# Altium PCB IMX6WBED.PcbDoc (part 2 of 10)
Units mil, origin at the board's own origin, x right, y up, seen from the top; angles counter-clockwise.
Board outline 3318.23 x 4815.16 mil, 6 copper layers (Top Layer, L2_GND_1, L3_INT_1, L6_INT_2, L7_PWR_2, Bottom Layer), stack 27.7 mil thick; 504 components, 400 nets, 2357 pads, 1199 vias.
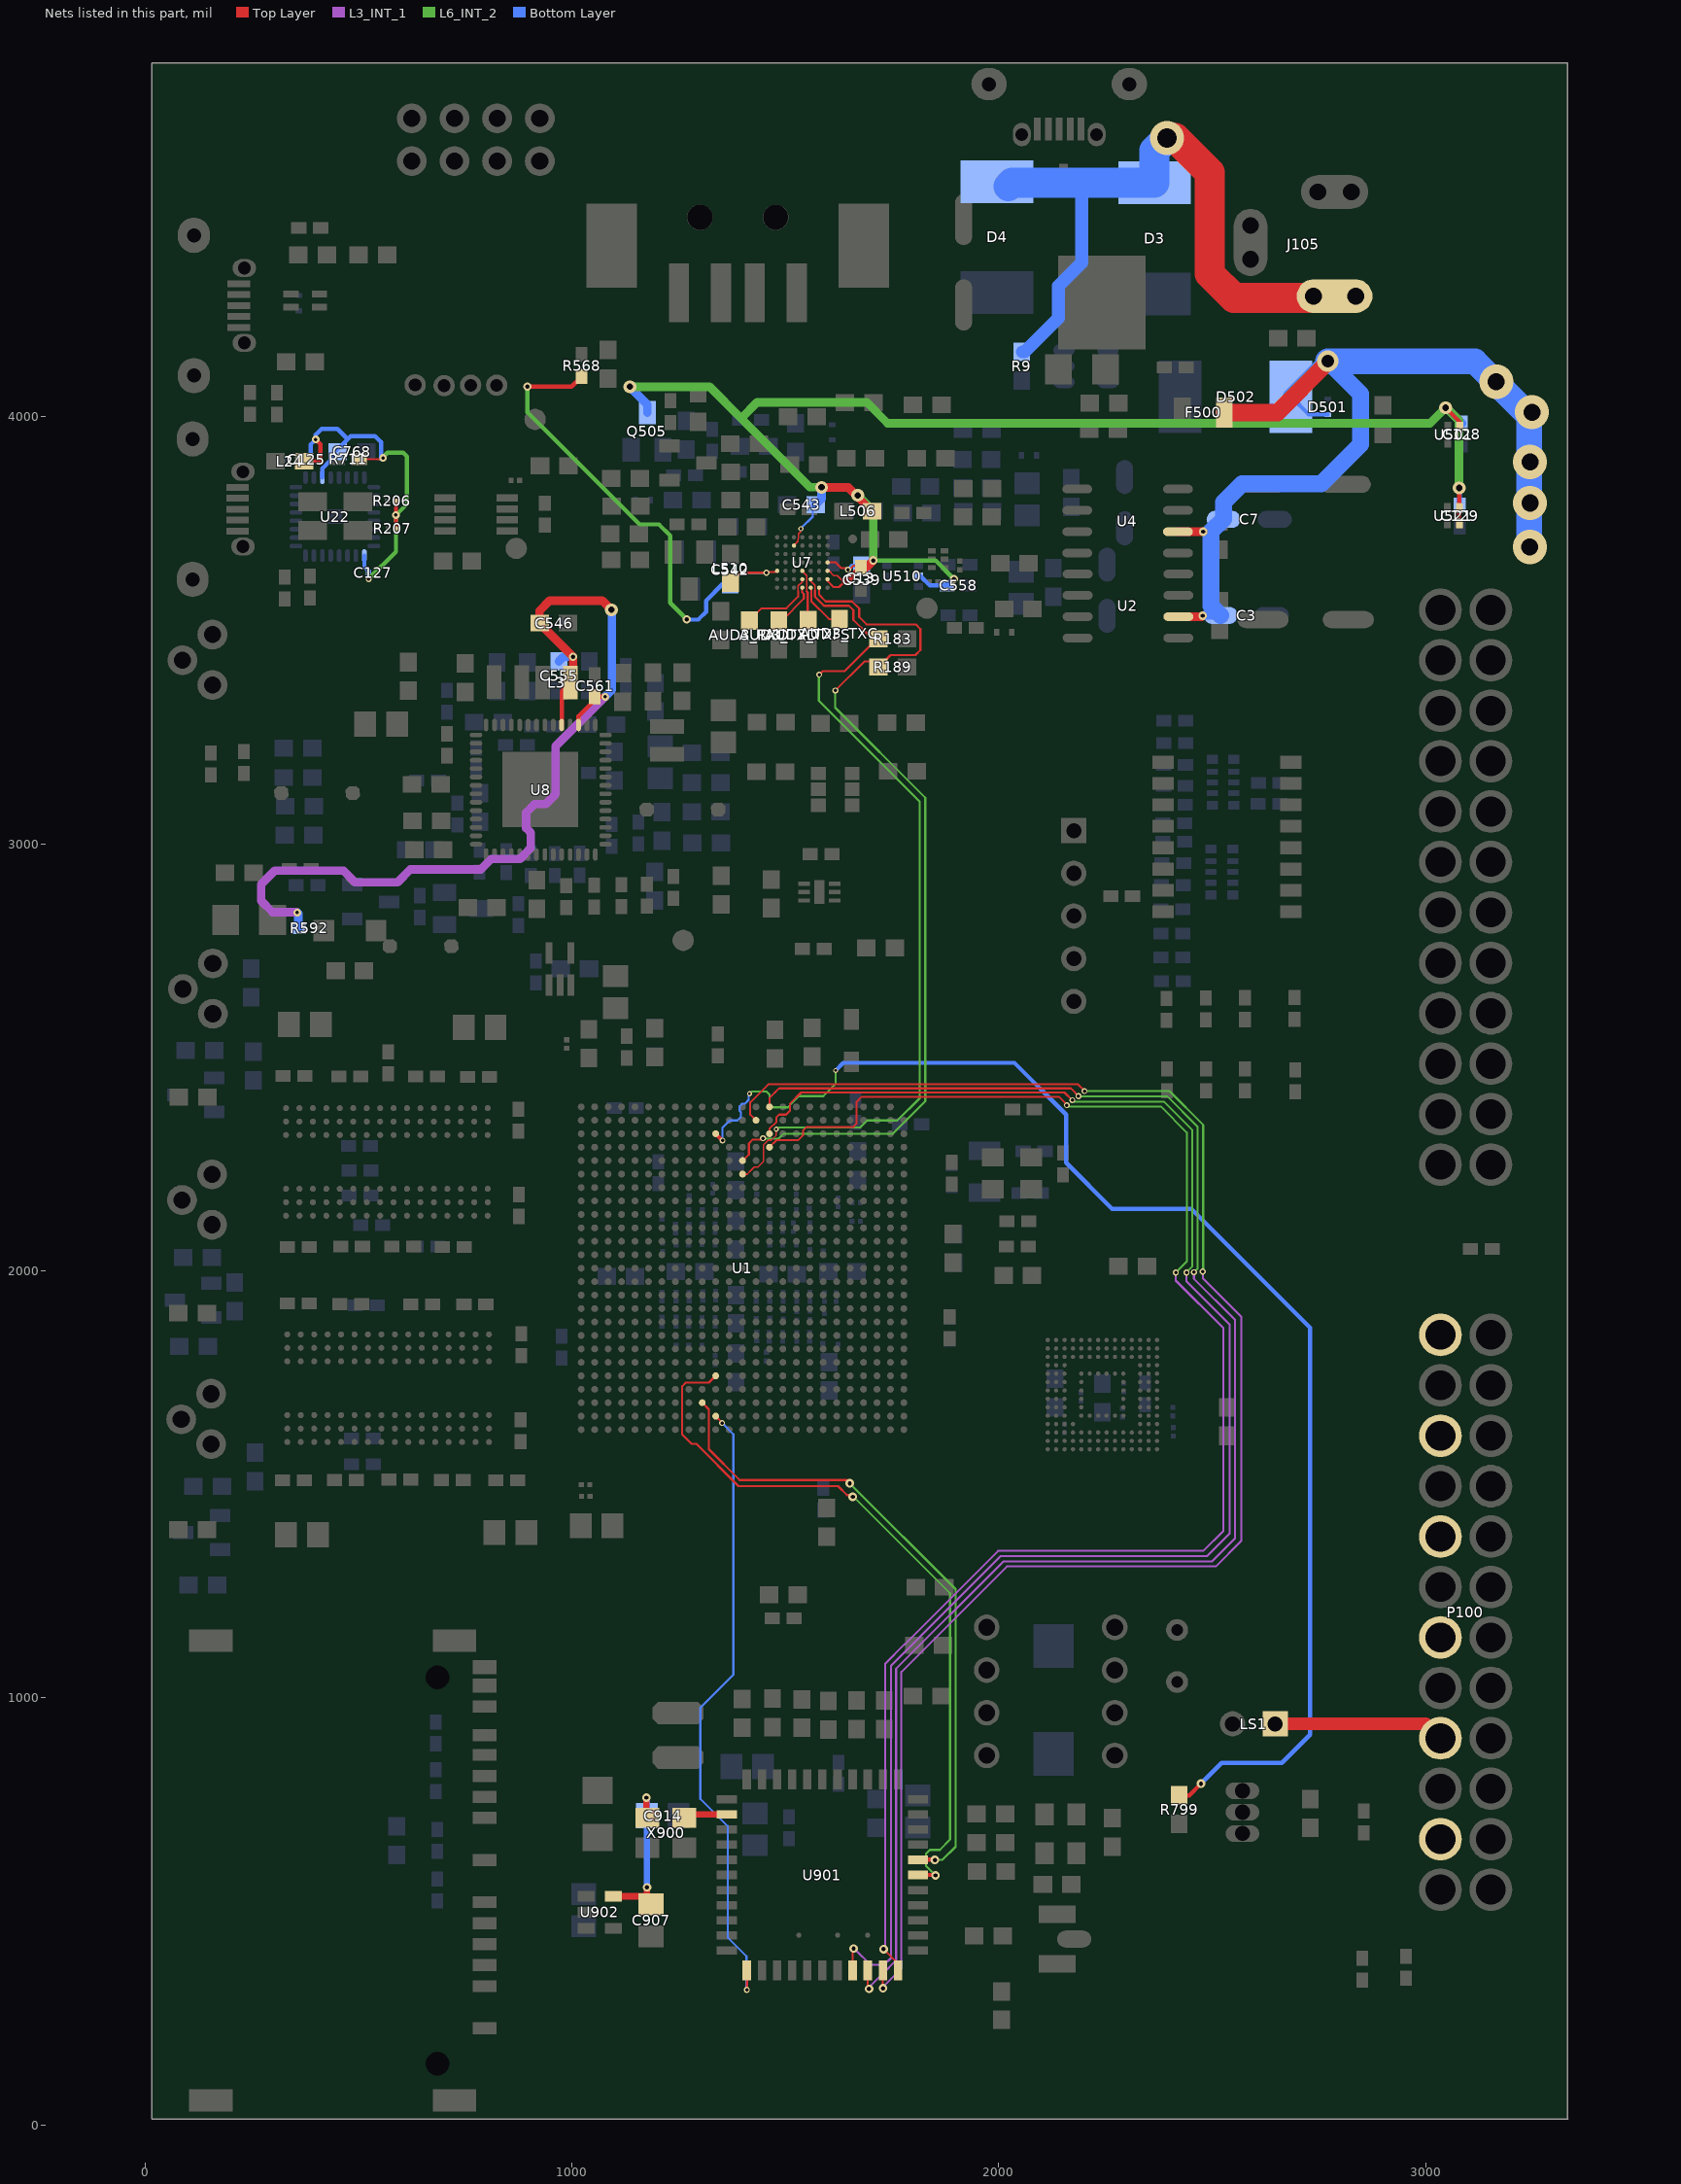
[diagram p6: the nets of this part, all layers, seen from the top]

## Footprints (in the part's own frame and the unit in brackets; to place one, negate y for a bottom-side part, rotate by r counter-clockwise, add the part's x,y. Pads: shape width x height; smd on the part's side, far side on the other; paste and mask are expansions set on the pad) (continued)
IMX6DL-BGA624X25 [mil] "IMX6DL"
  round 16 smd: A2(31.5,0) A3(62.99,0) A4(94.49,0) A5(125.98,0) A6(157.48,0) A7(188.98,0) A8(220.47,0) A9(251.97,0) A10(283.46,0) A11(314.96,0) A12(346.46,0) A13(377.95,0) A14(409.45,0) A15(440.94,0) A16(472.44,0) A17(503.94,0) A18(535.43,0) A19(566.93,0) A20(598.42,0) A21(629.92,0) A22(661.42,0) A23(692.91,0) A24(724.41,0) A25(755.9,0) AA1(0,-629.92) AA2(31.5,-629.92) AA3(62.99,-629.92) AA4(94.49,-629.92) AA5(125.98,-629.92) AA6(157.48,-629.92) AA7(188.98,-629.92) AA8(220.47,-629.92) AA9(251.97,-629.92) AA10(283.46,-629.92) AA11(314.96,-629.92) AA12(346.46,-629.92) AA13(377.95,-629.92) AA14(409.45,-629.92) AA15(440.94,-629.92) AA16(472.44,-629.92) AA17(503.94,-629.92) AA18(535.43,-629.92) AA19(566.93,-629.92) AA20(598.42,-629.92) AA21(629.92,-629.92) AA22(661.42,-629.92) AA23(692.91,-629.92) AA24(724.41,-629.92) AA25(755.9,-629.92) AB1(0,-661.42) AB2(31.5,-661.42) AB3(62.99,-661.42) AB4(94.49,-661.42) AB5(125.98,-661.42) AB6(157.48,-661.42) AB7(188.98,-661.42) AB8(220.47,-661.42) AB9(251.97,-661.42) AB10(283.46,-661.42) AB11(314.96,-661.42) AB12(346.46,-661.42) AB13(377.95,-661.42) AB14(409.45,-661.42) AB15(440.94,-661.42) AB16(472.44,-661.42) AB17(503.94,-661.42) AB18(535.43,-661.42) AB19(566.93,-661.42) AB20(598.42,-661.42) AB21(629.92,-661.42) AB22(661.42,-661.42) AB23(692.91,-661.42) AB24(724.41,-661.42) AB25(755.9,-661.42) AC1(0,-692.91) AC2(31.5,-692.91) AC3(62.99,-692.91) AC4(94.49,-692.91) AC5(125.98,-692.91) AC6(157.48,-692.91) AC7(188.98,-692.91) AC8(220.47,-692.91) AC9(251.97,-692.91) AC10(283.46,-692.91) AC11(314.96,-692.91) AC12(346.46,-692.91) AC13(377.95,-692.91) AC14(409.45,-692.91) AC15(440.94,-692.91) AC16(472.44,-692.91) AC17(503.94,-692.91) AC18(535.43,-692.91) AC19(566.93,-692.91) AC20(598.42,-692.91) AC21(629.92,-692.91) AC22(661.42,-692.91) AC23(692.91,-692.91) AC24(724.41,-692.91) AC25(755.9,-692.91) AD1(0,-724.41) AD2(31.5,-724.41) AD3(62.99,-724.41) AD4(94.49,-724.41) AD5(125.98,-724.41) AD6(157.48,-724.41) AD7(188.98,-724.41) AD8(220.47,-724.41) AD9(251.97,-724.41) AD10(283.46,-724.41) AD11(314.96,-724.41) AD12(346.46,-724.41) AD13(377.95,-724.41) AD14(409.45,-724.41) AD15(440.94,-724.41) AD16(472.44,-724.41) AD17(503.94,-724.41) AD18(535.43,-724.41) AD19(566.93,-724.41) AD20(598.42,-724.41) AD21(629.92,-724.41) AD22(661.42,-724.41) AD23(692.91,-724.41) AD24(724.41,-724.41) AD25(755.9,-724.41) AE1(0,-755.9) AE2(31.5,-755.9) AE3(62.99,-755.9) AE4(94.49,-755.9) AE5(125.98,-755.9) AE6(157.48,-755.9) AE7(188.98,-755.9) AE8(220.47,-755.9) AE9(251.97,-755.9) AE10(283.46,-755.9) AE11(314.96,-755.9) AE12(346.46,-755.9) AE13(377.95,-755.9) AE14(409.45,-755.9) AE15(440.94,-755.9) AE16(472.44,-755.9) AE17(503.94,-755.9) AE18(535.43,-755.9) AE19(566.93,-755.9) AE20(598.42,-755.9) AE21(629.92,-755.9) AE22(661.42,-755.9) AE23(692.91,-755.9) AE24(724.41,-755.9) AE25(755.9,-755.9) B1(0,-31.5) B2(31.5,-31.5) B3(62.99,-31.5) B4(94.49,-31.5) B5(125.98,-31.5) B6(157.48,-31.5) B7(188.98,-31.5) B8(220.47,-31.5) B9(251.97,-31.5) B10(283.46,-31.5) B11(314.96,-31.5) B12(346.46,-31.5) B13(377.95,-31.5) B14(409.45,-31.5) B15(440.94,-31.5) B16(472.44,-31.5) B17(503.94,-31.5) B18(535.43,-31.5) B19(566.93,-31.5) B20(598.42,-31.5) B21(629.92,-31.5) B22(661.42,-31.5) B23(692.91,-31.5) B24(724.41,-31.5) B25(755.9,-31.5) C1(0,-62.99) C2(31.5,-62.99) C3(62.99,-62.99) C4(94.49,-62.99) C5(125.98,-62.99) C6(157.48,-62.99) C7(188.98,-62.99) C8(220.47,-62.99) C9(251.97,-62.99) C10(283.46,-62.99) C11(314.96,-62.99) C12(346.46,-62.99) C13(377.95,-62.99) C14(409.45,-62.99) C15(440.94,-62.99) C16(472.44,-62.99) C17(503.94,-62.99) C18(535.43,-62.99) C19(566.93,-62.99) C20(598.42,-62.99) C21(629.92,-62.99) C22(661.42,-62.99) C23(692.91,-62.99) C24(724.41,-62.99) C25(755.9,-62.99) D1(0,-94.49) D2(31.5,-94.49) D3(62.99,-94.49) D4(94.49,-94.49) D5(125.98,-94.49) D6(157.48,-94.49) D7(188.98,-94.49) D8(220.47,-94.49) D9(251.97,-94.49) D10(283.46,-94.49) D11(314.96,-94.49) D12(346.46,-94.49) D13(377.95,-94.49) D14(409.45,-94.49) D15(440.94,-94.49) D16(472.44,-94.49) D17(503.94,-94.49) D18(535.43,-94.49) D19(566.93,-94.49) D20(598.42,-94.49) D21(629.92,-94.49) D22(661.42,-94.49) D23(692.91,-94.49) D24(724.41,-94.49) D25(755.9,-94.49) E1(0,-125.98) E2(31.5,-125.98) E3(62.99,-125.98) E4(94.49,-125.98) E5(125.98,-125.98) E6(157.48,-125.98) E7(188.98,-125.98) E8(220.47,-125.98) E9(251.97,-125.98) E10(283.46,-125.98) E11(314.96,-125.98) E12(346.46,-125.98) E13(377.95,-125.98) E14(409.45,-125.98) E15(440.94,-125.98) E16(472.44,-125.98) E17(503.94,-125.98) E18(535.43,-125.98) E19(566.93,-125.98) E20(598.42,-125.98) E21(629.92,-125.98) E22(661.42,-125.98) E23(692.91,-125.98) E24(724.41,-125.98) E25(755.9,-125.98) F1(0,-157.48) F2(31.5,-157.48) F3(62.99,-157.48) F4(94.49,-157.48) F5(125.98,-157.48) F6(157.48,-157.48) F7(188.98,-157.48) F8(220.47,-157.48) F9(251.97,-157.48) F10(283.46,-157.48) F11(314.96,-157.48) F12(346.46,-157.48) F13(377.95,-157.48) F14(409.45,-157.48) F15(440.94,-157.48) F16(472.44,-157.48) F17(503.94,-157.48) F18(535.43,-157.48) F19(566.93,-157.48) F20(598.42,-157.48) F21(629.92,-157.48) F22(661.42,-157.48) F23(692.91,-157.48) F24(724.41,-157.48) F25(755.9,-157.48) G1(0,-188.98) G2(31.5,-188.98) G3(62.99,-188.98) G4(94.49,-188.98) G5(125.98,-188.98) G6(157.48,-188.98) G7(188.98,-188.98) G8(220.47,-188.98) G9(251.97,-188.98) G10(283.46,-188.98) G11(314.96,-188.98) G12(346.46,-188.98) G13(377.95,-188.98) G14(409.45,-188.98) G15(440.94,-188.98) G16(472.44,-188.98) G17(503.94,-188.98) G18(535.43,-188.98) G19(566.93,-188.98) G20(598.42,-188.98) G21(629.92,-188.98) G22(661.42,-188.98) G23(692.91,-188.98) G24(724.41,-188.98) G25(755.9,-188.98) H1(0,-220.47) H2(31.5,-220.47) H3(62.99,-220.47) H4(94.49,-220.47) H5(125.98,-220.47) H6(157.48,-220.47) H7(188.98,-220.47) H8(220.47,-220.47) H9(251.97,-220.47) H10(283.46,-220.47) H11(314.96,-220.47) H12(346.46,-220.47) H13(377.95,-220.47) H14(409.45,-220.47) H15(440.94,-220.47) H16(472.44,-220.47) H17(503.94,-220.47) H18(535.43,-220.47) H19(566.93,-220.47) H20(598.42,-220.47) H21(629.92,-220.47) H22(661.42,-220.47) H23(692.91,-220.47) H24(724.41,-220.47) H25(755.9,-220.47) J1(0,-251.97) J2(31.5,-251.97) J3(62.99,-251.97) J4(94.49,-251.97) J5(125.98,-251.97) J6(157.48,-251.97) J7(188.98,-251.97) J8(220.47,-251.97) J9(251.97,-251.97) J10(283.46,-251.97) J11(314.96,-251.97) J12(346.46,-251.97) J13(377.95,-251.97) J14(409.45,-251.97) J15(440.94,-251.97) J16(472.44,-251.97) J17(503.94,-251.97) J18(535.43,-251.97) J19(566.93,-251.97) J20(598.42,-251.97) J21(629.92,-251.97) J22(661.42,-251.97) J23(692.91,-251.97) J24(724.41,-251.97) J25(755.9,-251.97) K1(0,-283.46) K2(31.5,-283.46) K3(62.99,-283.46) K4(94.49,-283.46) K5(125.98,-283.46) K6(157.48,-283.46) K7(188.98,-283.46) K8(220.47,-283.46) K9(251.97,-283.46) K10(283.46,-283.46) K11(314.96,-283.46) K12(346.46,-283.46) K13(377.95,-283.46) K14(409.45,-283.46) K15(440.94,-283.46) K16(472.44,-283.46) K17(503.94,-283.46) K18(535.43,-283.46) K19(566.93,-283.46) K20(598.42,-283.46) K21(629.92,-283.46) K22(661.42,-283.46) K23(692.91,-283.46) K24(724.41,-283.46) K25(755.9,-283.46) L1(0,-314.96) L2(31.5,-314.96) L3(62.99,-314.96) L4(94.49,-314.96) L5(125.98,-314.96) L6(157.48,-314.96) L7(188.98,-314.96) L8(220.47,-314.96) L9(251.97,-314.96) L10(283.46,-314.96) L11(314.96,-314.96) L12(346.46,-314.96) L13(377.95,-314.96) L14(409.45,-314.96) L15(440.94,-314.96) L16(472.44,-314.96) L17(503.94,-314.96) L18(535.43,-314.96) L19(566.93,-314.96) L20(598.42,-314.96) L21(629.92,-314.96) L22(661.42,-314.96) L23(692.91,-314.96) L24(724.41,-314.96) L25(755.9,-314.96) M1(0,-346.46) M2(31.5,-346.46) M3(62.99,-346.46) M4(94.49,-346.46) M5(125.98,-346.46) M6(157.48,-346.46) M7(188.98,-346.46) M8(220.47,-346.46) M9(251.97,-346.46) M10(283.46,-346.46) M11(314.96,-346.46) M12(346.46,-346.46) M13(377.95,-346.46) M14(409.45,-346.46) M15(440.94,-346.46) M16(472.44,-346.46) M17(503.94,-346.46) M18(535.43,-346.46) M19(566.93,-346.46) M20(598.42,-346.46) M21(629.92,-346.46) M22(661.42,-346.46) M23(692.91,-346.46) M24(724.41,-346.46) M25(755.9,-346.46) N1(0,-377.95) N2(31.5,-377.95) N3(62.99,-377.95) N4(94.49,-377.95) N5(125.98,-377.95) N6(157.48,-377.95) N7(188.98,-377.95) N8(220.47,-377.95) N9(251.97,-377.95) N10(283.46,-377.95) N11(314.96,-377.95) N12(346.46,-377.95) N13(377.95,-377.95) N14(409.45,-377.95) N15(440.94,-377.95) N16(472.44,-377.95) N17(503.94,-377.95) N18(535.43,-377.95) N19(566.93,-377.95) N20(598.42,-377.95) N21(629.92,-377.95) N22(661.42,-377.95) N23(692.91,-377.95) N24(724.41,-377.95) N25(755.9,-377.95) P1(0,-409.45) P2(31.5,-409.45) P3(62.99,-409.45) P4(94.49,-409.45) P5(125.98,-409.45) P6(157.48,-409.45) P7(188.98,-409.45) P8(220.47,-409.45) P9(251.97,-409.45) P10(283.46,-409.45) P11(314.96,-409.45) P12(346.46,-409.45) P13(377.95,-409.45) P14(409.45,-409.45) P15(440.94,-409.45) P16(472.44,-409.45) P17(503.94,-409.45) P18(535.43,-409.45) P19(566.93,-409.45) P20(598.42,-409.45) P21(629.92,-409.45) P22(661.42,-409.45) P23(692.91,-409.45) P24(724.41,-409.45) P25(755.9,-409.45) R1(0,-440.94) R2(31.5,-440.94) R3(62.99,-440.94) R4(94.49,-440.94) R5(125.98,-440.94) R6(157.48,-440.94) R7(188.98,-440.94) R8(220.47,-440.94) R9(251.97,-440.94) R10(283.46,-440.94) R11(314.96,-440.94) R12(346.46,-440.94) R13(377.95,-440.94) R14(409.45,-440.94) R15(440.94,-440.94) R16(472.44,-440.94) R17(503.94,-440.94) R18(535.43,-440.94) R19(566.93,-440.94) R20(598.42,-440.94) R21(629.92,-440.94) R22(661.42,-440.94) R23(692.91,-440.94) R24(724.41,-440.94) R25(755.9,-440.94) T1(0,-472.44) T2(31.5,-472.44) T3(62.99,-472.44) T4(94.49,-472.44) T5(125.98,-472.44) T6(157.48,-472.44) T7(188.98,-472.44) T8(220.47,-472.44) T9(251.97,-472.44) T10(283.46,-472.44) T11(314.96,-472.44) T12(346.46,-472.44) T13(377.95,-472.44) T14(409.45,-472.44) T15(440.94,-472.44) T16(472.44,-472.44) T17(503.94,-472.44) T18(535.43,-472.44) T19(566.93,-472.44) T20(598.42,-472.44) T21(629.92,-472.44) T22(661.42,-472.44) T23(692.91,-472.44) T24(724.41,-472.44) T25(755.9,-472.44) U1(0,-503.94) U2(31.5,-503.94) U3(62.99,-503.94) U4(94.49,-503.94) U5(125.98,-503.94) U6(157.48,-503.94) U7(188.98,-503.94) U8(220.47,-503.94) U9(251.97,-503.94) U10(283.46,-503.94) U11(314.96,-503.94) U12(346.46,-503.94) U13(377.95,-503.94) U14(409.45,-503.94) U15(440.94,-503.94) U16(472.44,-503.94) U17(503.94,-503.94) U18(535.43,-503.94) U19(566.93,-503.94) U20(598.42,-503.94) U21(629.92,-503.94) U22(661.42,-503.94) U23(692.91,-503.94) U24(724.41,-503.94) U25(755.9,-503.94) V1(0,-535.43) V2(31.5,-535.43) V3(62.99,-535.43) V4(94.49,-535.43) V5(125.98,-535.43) V6(157.48,-535.43) V7(188.98,-535.43) V8(220.47,-535.43) V9(251.97,-535.43) V10(283.46,-535.43) V11(314.96,-535.43) V12(346.46,-535.43) V13(377.95,-535.43) V14(409.45,-535.43) V15(440.94,-535.43) V16(472.44,-535.43) V17(503.94,-535.43) V18(535.43,-535.43) V19(566.93,-535.43) V20(598.42,-535.43) V21(629.92,-535.43) V22(661.42,-535.43) V23(692.91,-535.43) V24(724.41,-535.43) V25(755.9,-535.43) W1(0,-566.93) W2(31.5,-566.93) W3(62.99,-566.93) W4(94.49,-566.93) W5(125.98,-566.93) W6(157.48,-566.93) W7(188.98,-566.93) W8(220.47,-566.93) W9(251.97,-566.93) W10(283.46,-566.93) W11(314.96,-566.93) W12(346.46,-566.93) W13(377.95,-566.93) W14(409.45,-566.93) W15(440.94,-566.93) W16(472.44,-566.93) W17(503.94,-566.93) W18(535.43,-566.93) W19(566.93,-566.93) W20(598.42,-566.93) W21(629.92,-566.93) W22(661.42,-566.93) W23(692.91,-566.93) W24(724.41,-566.93) W25(755.9,-566.93) Y1(0,-598.42) Y2(31.5,-598.42) Y3(62.99,-598.42) Y4(94.49,-598.42) Y5(125.98,-598.42) Y6(157.48,-598.42) Y7(188.98,-598.42) Y8(220.47,-598.42) Y9(251.97,-598.42) Y10(283.46,-598.42) Y11(314.96,-598.42) Y12(346.46,-598.42) Y13(377.95,-598.42) Y14(409.45,-598.42) Y15(440.94,-598.42) Y16(472.44,-598.42) Y17(503.94,-598.42) Y18(535.43,-598.42) Y19(566.93,-598.42) Y20(598.42,-598.42) Y21(629.92,-598.42) Y22(661.42,-598.42) Y23(692.91,-598.42) Y24(724.41,-598.42) Y25(755.9,-598.42)
  silkscreen extent -40,-796 797,42
IRFR/U9024N_TO-252AA [mil]
  rect 205x220 smd: D(90,300)
  rect 20x50 smd: G(0,0) S(179.92,0)
  silkscreen extent -45,0 230,325
IRLML6401 [mil]
  rect 40x55 smd: 1(74.8,0) 2(0,0) 3(38,-86.6)
  silkscreen extent -10,-85 85,0
KLD-0202 [mm] "DC Power Jack, 2.5mm, KLD Series, PCB Mount"
  oval 2x4.5 all layers, no hole: 1(13.7,0)
  round 1.5 hole 1: 1A(13.7,-1.25) 1B(13.7,1.25) 2A(7.5,-1) 2B(7.5,1) 3A(9.5,-5) 3B(11.5,-5)
  oval 2x4 all layers, no hole: 2(7.5,0)
  oval 4x2 all layers, no hole: 3(10.5,-5)
  silkscreen extent 0,-4.5 14.6,4.5
LED_0603 [mm]
  rect 1.1x1 smd: 1(-0.85,0) 2(0.85,0)
  silkscreen extent -1.78,-0.76 1.65,1.4
LM4871M-SOP8 [mil]
  oval 70x20 smd: 1(0,0) 2(0,-50) 3(0,-100) 4(0,-150) 5(236,-150) 6(236,-100) 7(236,-50) 8(236,0)
  silkscreen extent -50,-170 290,20
LPS4018-222MLC [mil]
  oct 33.3x33.3 smd rot 93: 1(0,0) 2(144.18,0)
  silkscreen extent -17,-96 141,97
LPS5015-102MLC-SMT [mil]
  oct 33.3x33.3 smd rot 3: 1(0,0) 2(167.32,0)
  silkscreen extent -25,-108 192,108
LTC3025 [mil]
  rect 27x10 smd: 1(-35.88,19.69) 2(-35.88,0) 3(-35.88,-19.69) 4(36,-19.69) 5(36,0) 6(36,19.69)
  rect 24x56 smd: 7(0.06,0)
  silkscreen extent -48,-55 48,55
LTC4412-TSOT-23 [mil]
  oval 50x28 smd: 1(0,0) 2(0,-37.4) 3(0,-74.8) 4(103,-74.8) 5(103,-37.4) 6(103,0)
  silkscreen extent -35,-100 140,25
MAX6897-SOT23-6 [mil]
  rect 35x31.5 smd: 1(0,0) 2(0,-37.4) 3(0,-74.8) 4(78.74,-74.8) 5(78.74,-37.4) 6(78.74,0)
  silkscreen extent -40,-100 120,30
MBR140SFT-SOD123 [mil]
  rect 48x50 smd: 1(0,0) 2(122,0)
  silkscreen extent -3,-45 165,45
micro-USB-port [mil]
  rect 16x53 smd: 1(0,0) 2(25.59,0) 3(51.18,0) 4(76.77,0) 5(102.36,0)
  oval 42x55 hole 30 mask+2: S1(-36.42,12.8) S2(138.78,12.8)
  oval 83x75 hole 33: S3(-113.19,-105.31) S4(215.55,-105.31)
  silkscreen extent -108,-55 209,28
MICRO-USB-PORT [mil]
  rect 16x53 smd: 1(0,0) 2(25.59,0) 3(51.18,0) 4(76.77,0) 5(102.36,0)
  oval 42x55 hole 30 mask+2: S1(-36.42,12.8) S2(138.78,12.8)
  oval 83x75 hole 33: S3(-113.19,-105.31) S4(215.55,-105.31)
  silkscreen extent -108,-55 209,28
MMBT3904LT1G-SOT23 [mil]
  rect 30x48 smd: 1(0,0) 2(80,0) 3(40,86)
  silkscreen extent -27,9 107,77
MMP0100F0AEP [mil]
  oval 29x11 smd: 1(0,0) 2(0,-19.69) 3(0,-39.37) 4(0,-59.06) 5(0,-78.74) 6(0,-98.43) 7(0,-118.11) 8(0,-137.8) 9(0,-157.48) 10(0,-177.16) 11(0,-196.85) 12(0,-216.53) 13(0,-236.22) 14(0,-255.9) 29(303.28,-255.9) 30(303.28,-236.22) 31(303.28,-216.53) 32(303.28,-196.85) 33(303.28,-177.16) 34(303.28,-157.48) 35(303.28,-137.8) 36(303.28,-118.11) 37(303.28,-98.43) 38(303.28,-78.74) 39(303.28,-59.06) 40(303.28,-39.37) 41(303.28,-19.69) 42(303.28,0)
  oval 11x29 smd: 15(23.92,-279.27) 16(43.6,-279.27) 17(63.28,-279.27) 18(82.96,-279.27) 19(102.64,-279.27) 20(122.32,-279.27) 21(142,-279.27) 22(161.68,-279.27) 23(181.36,-279.27) 24(201.04,-279.27) 25(220.72,-279.27) 26(240.4,-279.27) 27(260.08,-279.27) 28(279.76,-279.27) 43(279.76,24) 44(260.08,24) 45(240.4,24) 46(220.72,24) 47(201.04,24) 48(181.36,24) 49(161.68,24) 50(142,24) 51(122.32,24) 52(102.64,24) 53(82.96,24) 54(63.28,24) 55(43.6,24) 56(23.92,24)
  rect 177x177 smd: 57(153,-128)
  silkscreen extent -11,-293 315,35
MT41K128M16JT-BGA96 [mil]
  round 14 smd: A1(0,0) A2(31.5,0) A3(62.99,0) A7(188.98,0) A8(220.47,0) A9(251.97,0) B1(0,-31.5) B2(31.5,-31.5) B3(62.99,-31.5) B7(188.98,-31.5) B8(220.47,-31.5) B9(251.97,-31.5) C1(0,-62.99) C2(31.5,-62.99) C3(62.99,-62.99) C7(188.98,-62.99) C8(220.47,-62.99) C9(251.97,-62.99) D1(0,-94.49) D2(31.5,-94.49) D3(62.99,-94.49) D7(188.98,-94.49) D8(220.47,-94.49) D9(251.97,-94.49) E1(0,-125.98) E2(31.5,-125.98) E3(62.99,-125.98) E7(188.98,-125.98) E8(220.47,-125.98) E9(251.97,-125.98) F1(0,-157.48) F2(31.5,-157.48) F3(62.99,-157.48) F7(188.98,-157.48) F8(220.47,-157.48) F9(251.97,-157.48) G1(0,-188.98) G2(31.5,-188.98) G3(62.99,-188.98) G7(188.98,-188.98) G8(220.47,-188.98) G9(251.97,-188.98) H1(0,-220.47) H2(31.5,-220.47) H3(62.99,-220.47) H7(188.98,-220.47) H8(220.47,-220.47) H9(251.97,-220.47) J1(0,-251.97) J2(31.5,-251.97) J3(62.99,-251.97) J7(188.98,-251.97) J8(220.47,-251.97) J9(251.97,-251.97) K1(0,-283.46) K2(31.5,-283.46) K3(62.99,-283.46) K7(188.98,-283.46) K8(220.47,-283.46) K9(251.97,-283.46) L1(0,-314.96) L2(31.5,-314.96) L3(62.99,-314.96) L7(188.98,-314.96) L8(220.47,-314.96) L9(251.97,-314.96) M1(0,-346.46) M2(31.5,-346.46) M3(62.99,-346.46) M7(188.98,-346.46) M8(220.47,-346.46) M9(251.97,-346.46) N1(0,-377.95) N2(31.5,-377.95) N3(62.99,-377.95) N7(188.98,-377.95) N8(220.47,-377.95) N9(251.97,-377.95) P1(0,-409.45) P2(31.5,-409.45) P3(62.99,-409.45) P7(188.98,-409.45) P8(220.47,-409.45) P9(251.97,-409.45) R1(0,-440.94) R2(31.5,-440.94) R3(62.99,-440.94) R7(188.98,-440.94) R8(220.47,-440.94) R9(251.97,-440.94) T1(0,-472.44) T2(31.5,-472.44) T3(62.99,-472.44) T7(188.98,-472.44) T8(220.47,-472.44) T9(251.97,-472.44)
  silkscreen extent -29,-500 283,30
NC7SP125P5X [mil]
  rect 50x16 smd: 1(0,0) 2(0,-25.59) 3(0,-51.18) 4(74.8,-51.18) 5(74.8,0)
  silkscreen extent 3,-75 72,24
NC7WZ17-SC70-6 [mil]
  rect 21x16 smd: 1(0,0) 2(0,-25) 3(0,-50) 4(74,-50) 5(74,-25) 6(74,0)
  silkscreen extent -25,-70 100,20
NLSV1T34AM [mil]
  rect 19x12 smd: 1(0,0) 2(0,-19.68) 3(0,-39.36) 4(29.52,-39.36) 5(29.52,-19.68) 6(29.52,0)
  silkscreen extent -20,-55 50,15
NONPOLARITY_CAP_1206 [mm]
  rect 1.6x1.8 smd: 1(-1.4,0) 2(1.4,0)
  silkscreen extent -2.54,-1.14 2.41,1.14
nonpolarity_cap_1206 [mm]
  rect 1.6x1.8 smd: 1(-1.4,0) 2(1.4,0)
  silkscreen extent -2.54,-1.14 2.41,1.14
NSR0320MW2T1G-SOD323 [mil]
  rect 48x35 smd: 1(0,0) 2(100,0)
  silkscreen extent -25,-34 125,45
PIN2 [mm] "Photosensitive Diode; 2 Leads"
  rect 1.5x1.5 hole 0.9: 1(0,0)
  round 1.5 hole 0.9: 2(2.54,0)
  silkscreen extent -1.4,-1.4 3.94,2.17
"RN_resistance -SMT8" [mil]
  rect 21x26 smd: 1(128.6,-19.8) 5(21.4,-19.8) 6(21.4,-70.2) 10(128.6,-70.2)
  rect 14x26 smd: 2(100.2,-19.8) 3(75,-19.8) 4(49.8,-19.8) 7(49.8,-70.2) 8(75,-70.2) 9(100.2,-70.2)
  silkscreen extent 2,-90 155,-1
SD_CARD [mil]
  rect 55x28 smd: 1(-70.87,-267.52) 2(-70.87,-365.95) 3(-70.87,-464.37) 4(-70.87,-563.19) 5(-70.87,-661.62) 6(-70.87,-760.04) 7(-70.87,-855.32) 8(-70.87,-922.25) 9(-70.87,-169.1) 10(-70.87,-316.74) 11(-70.87,-415.16) 12(-70.87,-710.83) 13(-70.87,-809.26)
  rect 55x32 smd: 14(-70.87,-971.46) 15(-70.87,-1014.77)
  rect 102x53 smd: 16(0,-1076.78) 17(570.86,-1076.78) 18(570.86,0) 19(0,0)
  round 10 hole 56: " "(39.37,-85.63) " "(39.37,-991.15)
  Multi-Layer keep-out circle w1: c39.37,-991.15 r42.95
  Multi-Layer keep-out circle w1: c39.37,-85.63 r42.95
  silkscreen extent -51,-1077 622,0
SDIN8DE2-4G-EMMC-BGA153 [mil]
  round 10 smd: A1(0,0) A2(19.68,0) A3(39.37,0) A4(59.05,0) A5(78.74,0) A6(98.43,0) A7(118.11,0) A8(137.8,0) A9(157.48,0) A10(177.16,0) A11(196.85,0) A12(216.53,0) A13(236.22,0) A14(255.91,0) B1(0,-19.69) B2(19.68,-19.69) B3(39.37,-19.69) B4(59.05,-19.69) B5(78.74,-19.69) B6(98.43,-19.69) B7(118.11,-19.69) B8(137.8,-19.69) B9(157.48,-19.69) B10(177.16,-19.69) B11(196.85,-19.69) B12(216.53,-19.69) B13(236.22,-19.69) B14(255.91,-19.69) C1(0,-39.37) C2(19.68,-39.37) C3(39.37,-39.37) C4(59.05,-39.37) C5(78.74,-39.37) C6(98.43,-39.37) C7(118.11,-39.37) C8(137.8,-39.37) C9(157.48,-39.37) C10(177.16,-39.37) C11(196.85,-39.37) C12(216.53,-39.37) C13(236.22,-39.37) C14(255.91,-39.37) D1(0,-59.06) D2(19.68,-59.06) D3(39.37,-59.06) D4(59.05,-59.06) D12(216.53,-59.06) D13(236.22,-59.06) D14(255.91,-59.06) E1(0,-78.74) E2(19.68,-78.74) E3(39.37,-78.74) E5(78.74,-78.74) E6(98.43,-78.74) E7(118.11,-78.74) E8(137.8,-78.74) E9(157.48,-78.74) E10(177.16,-78.74) E12(216.53,-78.74) E13(236.22,-78.74) E14(255.91,-78.74) F1(0,-98.43) F2(19.68,-98.43) F3(39.37,-98.43) F5(78.74,-98.43) F10(177.16,-98.43) F12(216.53,-98.43) F13(236.22,-98.43) F14(255.91,-98.43) G1(0,-118.11) G2(19.68,-118.11) G3(39.37,-118.11) G5(78.74,-118.11) G10(177.16,-118.11) G12(216.53,-118.11) G13(236.22,-118.11) G14(255.91,-118.11) H1(0,-137.8) H2(19.68,-137.8) H3(39.37,-137.8) H5(78.74,-137.8) H10(177.16,-137.8) H12(216.53,-137.8) H13(236.22,-137.8) H14(255.91,-137.8) J1(0,-157.48) J2(19.68,-157.48) J3(39.37,-157.48) J5(78.74,-157.48) J10(177.16,-157.48) J12(216.53,-157.48) J13(236.22,-157.48) J14(255.91,-157.48) K1(0,-177.16) K2(19.68,-177.16) K3(39.37,-177.16) K5(78.74,-177.16) K6(98.43,-177.16) K7(118.11,-177.16) K8(137.8,-177.16) K9(157.48,-177.16) K10(177.16,-177.16) K12(216.53,-177.16) K13(236.22,-177.16) K14(255.91,-177.16) L1(0,-196.85) L2(19.68,-196.85) L3(39.37,-196.85) L12(216.53,-196.85) L13(236.22,-196.85) L14(255.91,-196.85) M1(0,-216.53) M2(19.68,-216.53) M3(39.37,-216.53) M4(59.05,-216.53) M5(78.74,-216.53) M6(98.43,-216.53) M7(118.11,-216.53) M8(137.8,-216.53) M9(157.48,-216.53) M10(177.16,-216.53) M11(196.85,-216.53) M12(216.53,-216.53) M13(236.22,-216.53) M14(255.91,-216.53) N1(0,-236.22) N2(19.68,-236.22) N3(39.37,-236.22) N4(59.05,-236.22) N5(78.74,-236.22) N6(98.43,-236.22) N7(118.11,-236.22) N8(137.8,-236.22) N9(157.48,-236.22) N10(177.16,-236.22) N11(196.85,-236.22) N12(216.53,-236.22) N13(236.22,-236.22) N14(255.91,-236.22) P1(0,-255.9) P2(19.68,-255.9) P3(39.37,-255.9) P4(59.05,-255.9) P5(78.74,-255.9) P6(98.43,-255.9) P7(118.11,-255.9) P8(137.8,-255.9) P9(157.48,-255.9) P10(177.16,-255.9) P11(196.85,-255.9) P12(216.53,-255.9) P13(236.22,-255.9) P14(255.91,-255.9)
  silkscreen extent -100,-380 360,130
SHORT_SH [mm]
  rect 1.1x1 smd: 1(-0.85,0) 2(0.85,0)
  silkscreen extent -1.52,-0.76 1.52,0.76
"SMD Electrolytic Capacitors 4X 5.3" [mil]
  oval 80x40 smd: 1(120,0) 2(0,0)
  silkscreen extent -40,-85 160,110
"SMD Electrolytic Capacitors 6.3 X 7.7" [mil]
  oval 120x40 smd: 1(200,0) 2(0,0)
  silkscreen extent -50,-140 240,170
SMLJ60S6-TP-DO214AB [mil]
  rect 100x170 smd: A(0,0) B(260,0)
  silkscreen extent -17,-130 277,201
SN74LVC2G126-SSOP8 [mil]
  rect 50x17 smd: 1(0,0) 2(0,-25.59) 3(0,-51.19) 4(0,-76.78) 5(145.66,-76.78) 6(145.66,-51.19) 7(145.66,-25.59) 8(145.66,0)
  silkscreen extent -42,-101 185,24
TP#1 [mil]
  round 50 smd: 9(0,0)
TP#2 [mil]
  round 20 smd: 9(0,0)
USB_A [mm]
  round 1.524 hole 1.5 unplated: 0(-2.25,-2.242) 0(2.25,-2.242)
  rect 1.2x3.5 smd: 1(-3.5,2.242) 2(-1,2.242) 3(1,2.242) 4(3.5,2.242)
  rect 3x5 smd: 5(7.5,-0.543) 6(-7.5,-0.543)
  silkscreen extent -5.71,-11.3 5.72,1.9
via [mil]
  round 50 hole 30: 9(0,0)
VLCF4018-2-inductor [mil]
  oct 53x120 smd: 1(0,0) 2(104,0)
  silkscreen extent -40,-75 144,76
VLS252010T-1R0N [mil]
  rect 34x79 smd: 1(0,0) 2(64.96,0)
  silkscreen extent -14,-49 78,49
WM8962-BGA49 [mil]
  round 10 smd: A1(0,0) A2(19.68,0) A3(39.36,0) A4(59.04,0) A5(78.72,0) A6(98.4,0) A7(118.08,0) B1(0,-19.68) B2(19.68,-19.68) B3(39.36,-19.68) B4(59.04,-19.68) B5(78.72,-19.68) B6(98.4,-19.68) B7(118.08,-19.68) C1(0,-39.36) C2(19.68,-39.36) C3(39.36,-39.36) C4(59.04,-39.36) C5(78.72,-39.36) C6(98.4,-39.36) C7(118.08,-39.36) D1(0,-59.04) D2(19.68,-59.04) D3(39.36,-59.04) D4(59.04,-59.04) D5(78.72,-59.04) D6(98.4,-59.04) D7(118.08,-59.04) E1(0,-78.72) E2(19.68,-78.72) E3(39.36,-78.72) E4(59.04,-78.72) E5(78.72,-78.72) E6(98.4,-78.72) E7(118.08,-78.72) F1(0,-98.4) F2(19.68,-98.4) F3(39.36,-98.4) F4(59.04,-98.4) F5(78.72,-98.4) F6(98.4,-98.4) F7(118.08,-98.4) G1(0,-118.08) G2(19.68,-118.08) G3(39.36,-118.08) G4(59.04,-118.08) G5(78.72,-118.08) G6(98.4,-118.08) G7(118.08,-118.08)
  silkscreen extent -15,-135 135,15
XC6219B182MR-SOT-25 [mil]
  rect 25x40 smd: 1(0,0) 2(37.4,0) 3(74.8,0) 4(74.8,63) 5(0,63)
  silkscreen extent -29,1 102,66
XTAL32.768KHZ-SMT [mil]
  rect 43x75 smd: 1(-49.21,0.02) 2(49.21,0.02)
  silkscreen extent -82,-48 82,48
XTL571300LLI24.000-10TR [mil]
  rect 51x43 smd: 1(0,0) 2(90.56,0) 3(90.56,74.8) 4(0,74.8)
  silkscreen extent -37,-40 128,115

## Part data
AUD3_RXD AUD3_TXC AUD3_TXD AUD3_TXFS SH1 SH3V00 SH3V0 SH8 SH11 SH15 SH50 SH100 SH101 SH503 SHA7 SHB2 U1-TX U1_RX: library part "SOLDER SHORT"
batterycharging: library part USB_A
C1 C2 C3 C4 C5 C6 C7 C8 C9 C788: library part "Cap Pol1", "Polarized Capacitor (Radial)"
C13 C15 C17 C18 C19 C20 C21 C22 C23 C24 C25 C26 C27 C31 C32 C33 C35 C36 C37 C38 C40 C41 C42 C43 C44 C45 C46 C47 C48 C49 C52 C53 C57 C58 C59 C61 C66 C69 C76 C77 C79 C94 C125 C126 C127 C501 C504 C505 C506 C519 C524 C525 C534 C539 C540 C541 C542 C543 C544 C545 C546 C547 C548 C549 C550 C551 C552 C553 C554 C555 C556 C559 C560 C561 C562 C563 C564 C565 C566 C567 C568 C569 C570 C571 C572 C573 C574 C575 C576 C577 C578 C579 C580 C581 C582 C583 C584 C586 C589 C590 C591 C592 C593 C594 C595 C596 C597 C599 C600 C604 C605 C613 C614 C615 C616 C617 C618 C619 C620 C621 C623 C627 C628 C629 C630 C632 C633 C634 C636 C640 C642 C643 C644 C645 C646 C647 C648 C649 C650 C652 C653 C654 C656 C657 C658 C659 C660 C661 C662 C663 C664 C665 C666 C669 C670 C671 C672 C674 C675 C676 C677 C679 C680 C682 C683 C684 C685 C686 C687 C688 C689 C690 C691 C692 C693 C694 C695 C696 C697 C698 C701 C702 C703 C704 C705 C706 C707 C708 C709 C710 C711 C712 C713 C714 C715 C716 C717 C720 C721 C722 C723 C724 C725 C727 C728 C730 C731 C746 C761 C763 C766 C767 C768 C769 C881 C882 C888 C889 C904 C905 C906 C907 C908 C912 C913 C914 C930 C931: library part Cap, "Capacitor"
C51 C55 C128 C129 C130 C200 C558 C601 C624 C639 C655: "Capacitor"
D1 D2 D201 D202 D203: library part LED0, "Typical INFRARED GaAs LED"
D3 D4 D502: library part SMLJ60S6-TP
D9: library part "Diode 11DQ03", "Schottky Rectifier"
D12: library part APB3025ESGC-F01
D501: library part "DIODE TVS"
J6: "Header, 5-Pin"
J105: "Low Voltage Power Supply Connector"
J519: library part JTAG_hornsocket8P
L12: "Magnetic-Core Inductor"
L24 L501 L506 L508 L510: library part "magnetic BEAD"
L504 L505 L507 L550 L551 L552 L553 L610 L666 L750 L850 L900: library part Inductor, "Inductor"
LS1: "Electrical Bell"
P100 P101: "Header, 12-Pin, Dual row"
P_SMA1: library part BNC, "BNC Elbow Connector"
Q1: library part IRFR/U9024N
Q315: "NPN General Purpose Amplifier"
QZ500: library part XTAL-32.768KHZ
R2 R3 R5 R6 R9 R10 R75 R158 R206 R207 R511 R512 R513 R541 R542 R554 R610 R677 R694 R711 R785 R786 R801 R802 R803 R804 R850 R901 R902 R903 R910 R911 R912 R913 R914 R915: library part Res2, "Resistor"
R19 R20 R21 R25 R27 R28 R29 R30 R31 R34 R35 R38 R43 R45 R85 R89 R94 R95 R97 R98 R104 R105 R106 R107 R108 R109 R125 R169 R170 R178 R179 R183 R189 R216 R304 R305 R306 R307 R308 R309 R310 R447 R448 R501 R502 R507 R525 R529 R544 R545 R552 R557 R564 R568 R569 R573 R589 R591 R592 R593 R599 R600 R602 R605 R620 R625 R632 R635 R670 R674 R675 R686 R687 R688 R689 R690 R691 R692 R693 R695 R696 R697 R698 R699 R700 R701 R702 R712 R725 R727 R799: "Resistor"
RN502 RN503: library part "RN res"
SW6: library part SW-8P
U9: library part LTC3025
U501 U521: library part ADMP421B
U512A: library part MTFC8GLCDM-emmc
Y1 Y100: library part XTAL
Y51: library part XTAL, "Crystal Oscillator"

## Free pads (board coordinates)
  round 60 on Top Overlay: 0(76.48,4545.6) 1(3223.67,77.8)

## Via types
v1: diameter 14, hole 8, Top Layer to Bottom Layer, 296 vias
v2: diameter 14, hole 8, Top Layer to Bottom Layer, tented both sides, 244 vias
v3: diameter 20, hole 10, Top Layer to Bottom Layer, 221 vias
v4: diameter 20, hole 10, Top Layer to Bottom Layer, tented both sides, 112 vias
v5: diameter 18, hole 8, Top Layer to Bottom Layer, tented both sides, 74 vias
v6: diameter 12, hole 6, Top Layer to Bottom Layer, tented both sides, 60 vias
v7: diameter 16, hole 8, Top Layer to Bottom Layer, 59 vias
v8: diameter 30, hole 15, Top Layer to Bottom Layer, 33 vias
v9: diameter 40, hole 20, Top Layer to Bottom Layer, 16 vias
v10: diameter 30, hole 15, Top Layer to Bottom Layer, tented both sides, 16 vias
v11: diameter 18, hole 8, Top Layer to Bottom Layer, 16 vias
v12: diameter 12, hole 6, Top Layer to Bottom Layer, 13 vias
v13: diameter 16, hole 8, Top Layer to Bottom Layer, tented both sides, 8 vias
v14: diameter 80, hole 40, Top Layer to Bottom Layer, 5 vias
v15: diameter 14, hole 6, Top Layer to Bottom Layer, tented both sides, 4 vias
v16: diameter 50, hole 30, Top Layer to Bottom Layer, 3 vias
v17: diameter 16, hole 10, Top Layer to Bottom Layer, 3 vias
v18: diameter 25, hole 15, Top Layer to Bottom Layer, tented both sides, 3 vias
v19: diameter 35, hole 20, Top Layer to Bottom Layer, tented both sides, 3 vias
v20: diameter 10, hole 6, Top Layer to Bottom Layer, 3 vias
v21: diameter 18, hole 10, Top Layer to Bottom Layer, tented both sides, 2 vias
v22: diameter 80, hole 45, Top Layer to Bottom Layer, 1 vias
v23: diameter 40, hole 20, Top Layer to Bottom Layer, tented both sides, 1 vias
v24: diameter 11, hole 6, Top Layer to Bottom Layer, tented both sides, 1 vias
v25: diameter 13, hole 6, Top Layer to Bottom Layer, tented both sides, 1 vias
v26: diameter 14, hole 6, Top Layer to Bottom Layer, 1 vias

## Nets (pads, with @x,y where several pads share a name; then routed paths per layer and width w, separated by ;. In a path a pad name is that pad's centre, name@x,y a point inside that pad or via, vN(x,y) a via of type N, cw(c..) or ccw(c..) an arc to the next point about the centre after c; other vN are vias at no path point)
5V_IN: C3.1 C7.1 D501.2 D502.A F500.2 LS1.1 P100.1 P100.5 P100.9 P100.13 P100.17 P100.21 U2.6 U4.6 | length 2833.5
  Top Layer w20: U2.6@2420.47,3531.9 2475.22,3531.9 v3(2477.5,3534.18) ; U4.6@2447.53,3730.9 U4.6@2419.47,3730.9 v3@2478.63,3730.9
  Top Layer w30: LS1.1@2647.47,938.9 3000.59,938.9 P100.17@3034.47,905.02
  Top Layer w40: F500.2@2527.89,4009.9 2652.42,4009.9 v16@2766.5,4123.98
  Bottom Layer w10: v3(2478.8,3730.88) 2496.91,3730.88 2497.26,3731.23 ; D502.A@2684.47,4046.9 2725.91,4005.46 D501.2@2770.47,4005.46
  Bottom Layer w20: C3.1@2480.47,3534.08 2481.29,3534.9 C3.1@2519.47,3534.9 ; C7.1@2526.2,3760.17 C7.1@2526.47,3759.9
  Bottom Layer w40: 2497.26,3730.88 2497.26,3557.11 C3.1@2519.47,3534.9 ; 2497.26,3731.23 2526.2,3760.17 2526.2,3799.6 2569.96,3843.36 2755.05,3843.36 2847.1,3935.41 2847.1,4053.81 v16(2770.79,4130.12) 2767.69,4130.12 D502.A@2684.47,4046.9
  Bottom Layer w60: v16(2770.79,4130.12) 3115.02,4130.12 3242.01,4003.13 v14@3242.01,3696.85
  other v14: 3243.71,3694.96 3244.4,3798.09 3244.4,3894.35 3248.81,4010.81 3165.32,4082.25
5V_OUT: D3.A D4.A J105.1 J105.1A J105.1B R9.1 | length 1559.2
  Top Layer w70: v22(2393.8,4652.99) 2413.54,4652.99 2494.12,4572.41 2494.12,4334.88 2550.47,4278.53 2733.26,4278.53 J105.1A@2737.26,4282.53 ; v22@2394.97,4648.87 v22@2395.82,4649.72
  Bottom Layer w30: R9.1@2055.31,4152.3 2060.49,4152.3 2139.5,4231.31 2139.5,4306.21 2194.1,4360.81 2194.1,4547.9
  Bottom Layer w70: D4.A@2022.47,4539.9 2030.47,4547.9 2194.1,4547.9 D3.A@2364.47,4547.9 2364.47,4623.66 v22(2393.8,4652.99)
32.768K: U901.24 X900.3 | length 102.9
  Top Layer w15: X900.3@1263.07,718.9 1270.94,726.77 U901.24@1362.67,726.77
AU_CTS: U1.L4 U901.44 | length 3747.9
  Top Layer w4.7: U1.L4@1462.51,2289.41 1478.61,2305.51 1528.98,2305.51 1541.67,2318.2 1541.67,2329.19 1549.61,2337.13 1659.16,2337.13 1666.88,2344.85 1666.88,2395.8 1678.73,2407.65 2140.6,2407.65 v1@2159.76,2388.49 ; v3(1730.05,411.16) 1763.72,377.49 U901.44@1763.72,361.15
  L3_INT_1 w4.7: v3@1729.97,411.74 1733.88,415.65 1733.88,1080.14 1778.9,1125.16 1779.65,1125.16 1998.28,1343.79 2478.97,1343.79 2526.03,1390.85 2526.03,1865.5 2414.4,1977.13 v1(2414.4,1995.73) ; v3(1730.05,411.16) v3@1733.41,415.25
  L6_INT_2 w4.7: v1(2159.25,2387.67) 2162.17,2384.75 2379.44,2384.75 2440.18,2324.01 2440.18,2021.51 v1(2414.4,1995.73)
AU_RTS: U1.L3 U901.41 | length 3853.7
  Top Layer w4.7: U1.L3@1462.51,2320.91 1462.51,2332.58 1479.02,2349.09 1479.02,2359.6 1485.21,2365.79 1501.39,2365.79 1511.03,2375.43 1511.03,2391.78 1536.77,2417.52 2108.67,2417.52 ; U901.41@1657.43,361.15 1657.43,410.34 v3(1659.7,412.61) ; 2111.24,2417.52 2108.67,2417.52 ; v1@2172.11,2399.09 2153.68,2417.52 2108.67,2417.52
  L3_INT_1 w4.7: v3@1659.59,411.87 1661.99,411.87 1699.77,374.09 1730.89,374.09 1747.27,390.47 1747.27,454.46 1747.19,454.54 1747.19,1074.55 2004.35,1331.71 2487.85,1331.71 2540.74,1384.6 2540.74,1873.84 2439.42,1975.16 v1(2439.42,1995.95)
  L6_INT_2 w4.7: v1(2171.94,2399.6) 2175.28,2396.26 2386.26,2396.26 2453.18,2329.34 2453.18,2010.35 2439.42,1996.59 v1(2439.42,1995.95)
AU_RXD: U1.M2 U901.43 | length 3901.8
  Top Layer w4.7: U1.M2@1431.01,2352.4 1417.66,2365.75 1417.66,2394.21 1459.94,2436.49 2185.42,2436.49 v1@2200.72,2421.19 ; U901.43@1728.29,361.15 1728.29,320.03 v3(1728.61,319.71)
  Top Layer w5: U1.M2@1431.01,2352.4 U1.M2@1431.01,2354.09
  L3_INT_1 w4.7: v3(1728.61,319.71) 1728.61,322.95 1771.68,366.02 1771.68,470.78 1771.6,470.86 1771.6,1060.69 2018.46,1307.55 2508.18,1307.55 2567.95,1367.32 2567.95,1892.43 2477.63,1982.75 v1(2477.63,1998)
  L6_INT_2 w4.7: v1(2200.45,2420.91) 2399.44,2420.91 2478.6,2341.75 v1@2478.6,1998.68
AU_TXD: U1.L1 U901.42 | length 3815.7
  Top Layer w4.7: U1.L1@1462.51,2383.9 1462.51,2404.75 1475.89,2418.13 ; 1476.07,2418.13 1485.07,2427.13 2168.88,2427.13 v1@2186.75,2409.26 ; U901.42@1692.86,361.15 1692.86,321.09 v3(1695.88,318.07)
  L3_INT_1 w4.7: v3@1694.72,321.44 1695.5,321.44 1727.7,353.64 1727.89,353.64 1759.24,384.99 1759.24,466.16 ; 1759.22,466.18 1759.22,1067.98 2010.39,1319.15 2498.94,1319.15 2553.17,1373.38 2553.17,1885.23 2456.93,1981.47 v1(2456.93,1996.63)
  L6_INT_2 w4.7: v1@2187.06,2408.56 2205.57,2408.56 ; 2205.71,2408.7 2394.51,2408.7 2465.6,2337.61 2465.6,2005.3 v1(2456.93,1996.63)
  other v1: 2186.56,2409.06
AUD3_RXD: AUD3_RXD.2 U7.D2 | length 182.4
  Top Layer w3: 1529.47,3591.91 1529.47,3603.7 1539.51,3613.74 U7.D2@1539.51,3619.58
  Top Layer w4.7: AUD3_RXD.2@1415.47,3522.36 1444.45,3551.34 1502.13,3551.34 1529.47,3578.68 1529.47,3591.91
AUD3_TXC: AUD3_TXC.2 U7.E1 | length 117.4
  Top Layer w4.7: U7.E1@1560.47,3598.62 U7.E1@1559.19,3599.9 1560.56,3598.53 1560.56,3568 1602.2,3526.36 AUD3_TXC.2@1626.47,3526.36
AUD3_TXD: AUD3_TXD.2 U7.D1 | length 108.7
  Top Layer w4.7: AUD3_TXD.2@1484.47,3522.36 1491.4,3522.36 1543.09,3574.06 1543.09,3585.08 1539.51,3588.66 U7.D1@1539.51,3599.9 U7.D1@1540.47,3598.94
AUD3_TXFS: AUD3_TXFS.2 U7.D3 | length 121.7
  Top Layer w3: U7.D3@1539.51,3639.26 1539.51,3638.7 1549.73,3628.48 1549.69,3628.44 1549.69,3591.41
  Top Layer w4.7: 1549.69,3591.41 1552.12,3588.98 1552.12,3524.71 AUD3_TXFS.2@1553.47,3523.36
AUD_1V8: C13.2 C128.2 C129.2 C539.2 C543.2 C558.1 L506.1 Q505.3 U7.C6 U7.G2 U7.G3 U7.G4 U501.4 U510.5 U521.2 U521.4 | length 3882.2
  Top Layer w3: U7.C6@1519.83,3698.3 1529.93,3708.4 1529.93,3713.96 ; 1530.01,3714.05 1530.01,3725.44 1536.47,3731.9
  Top Layer w4: U7.G3@1598.55,3639.26 1601.82,3639.26 1613.14,3627.94 1621.71,3627.94 1633.14,3616.51 1639.47,3616.51
  Top Layer w5: U7.G2@1598.55,3619.58 1598.55,3615.22 1612.61,3601.16 1625.73,3601.16 1639.47,3614.9 ; U7.G4@1598.55,3658.94 1617.47,3658.94 1630.84,3645.57 v1@1642.82,3645.57 ; v1@1648.12,3640.27 1659.21,3651.36 C13.2@1676.47,3651.36 ; C13.2@1673.96,3650.36 C13.2@1675.47,3650.36
  Top Layer w10: v8(3046.38,4021.15) 3079.59,3987.94 U501.4@3079.59,3976.43 ; v8(3078.35,3833.48) 3078.59,3833.24 U521.4@3078.59,3786.43 U521.2@3078.59,3750.43
  Top Layer w15: 1639.47,3614.9 1643.88,3614.9 C13.2@1676.47,3647.49
  Top Layer w20: v8(1584.62,3834.86) 1646.97,3834.86 L506.1@1702.93,3778.9 ; C13.2@1676.47,3647.49 1689.61,3647.49 v4@1705.72,3663.6
  L6_INT_2 w10: v4(1705.99,3663.6) 1851.35,3663.6 v3(1894.87,3620.08)
  L6_INT_2 w20: v8(1135.55,4070.46) 1322,4070.46 1396.29,3996.17 ; v8@1584.62,3835.12 1557.34,3835.12 1396.29,3996.17 ; v8(1669.46,3816.21) 1705.99,3779.68 v4(1705.99,3663.6) ; v8(3046.38,4021.15) 3010.16,3984.93 1739.5,3984.93 1690.41,4034.02 1434.15,4034.02 1396.29,3996.17 ; v8@3046.45,4022.58 3078.06,3990.96 v8@3078.06,3827.48
  Bottom Layer w5: v6(1536.47,3737.9) 1536.47,3738.87 1563.93,3766.34 C543.2@1563.93,3789.9
  Bottom Layer w10: v1(1646.54,3641.85) 1656.05,3651.36 C539.2@1678.47,3651.36 1693.75,3651.36 v4(1705.99,3663.6) ; U510.5@1811.47,3626.9 1816.28,3626.9 1838.28,3604.9 C558.1@1878.88,3604.9 ; C558.1@1878.88,3610.12 C558.1@1878.88,3604.9 ; v3@1895.02,3619.93 1879.99,3604.9 C558.1@1878.88,3604.9 ; v8(3078.35,3833.48) 3079.59,3832.24 C129.2@3079.59,3793.02
  Bottom Layer w20: v8@1137.62,4067.11 1176.47,4028.26 Q505.3@1176.47,4009.5 ; C543.2@1570.93,3793.9 1584.62,3807.59 v8(1584.62,3834.86) ; v8(3046.38,4021.15) 3048.46,4021.15 C128.2@3084.59,3985.02
AUD_3V3: C542.2 L510.2 R568.2 U7.A3 | length 1234.9
  Top Layer w4.7: v2@1452.5,3631.93 v2(1455.47,3634.9) ; v2@1455.47,3636.9 1478.11,3636.9 U7.A3@1480.47,3639.26
  Top Layer w5: L510.2@1371.47,3611.44 1394.93,3634.9 v2(1455.47,3634.9)
  Top Layer w10: v3(895.55,4070.93) 999.09,4070.93 R568.2@1022.47,4094.31
  L6_INT_2 w10: v3@895.52,4070.8 895.52,4010.69 1158.23,3747.98 1203.56,3747.98 1229.82,3721.72 1229.82,3564.06 v3(1268.53,3525.35)
  Bottom Layer w5: C542.2@1370.47,3608.44 1396.93,3634.9 v2(1455.47,3634.9)
  Bottom Layer w10: v3@1268.26,3525.03 1295.75,3525.03 1314,3543.28 1314,3569.23 1353.21,3608.44 C542.2@1370.47,3608.44
AUX_3V15: C546.1 C555.1 C561.1 L3.1 R592.2 U8.17 U8.19 | length 2165.8
  Top Layer w10: U8.19@975.83,3278.17 975.83,3357.26 L3.1@996.47,3377.9 L3.1@1002.47,3383.9 ; v4(1002.47,3437.9) v4@1002.47,3439.9 ; U8.17@1015.19,3278.17 1015.19,3298.62 1053.47,3336.9 C561.1@1053.47,3344.31 v5(1077.47,3344.31) v5@1079.88,3344.31
  Top Layer w20: L3.1@1002.47,3383.9 v4(1002.47,3437.9) 924.01,3516.36 C546.1@924.01,3516.9 924.01,3545.44 948.13,3569.56 1070.81,3569.56 v10(1092.47,3547.9)
  L3_INT_1 w20: v5@354.47,2839.9 298.47,2839.9 271.47,2866.9 271.47,2904.9 303.47,2936.9 464.47,2936.9 491.47,2909.9 591.47,2909.9 621.47,2939.9 786,2939.9 810.57,2964.47 878.04,2964.47 903.47,2989.9 903.47,3025.9 892.47,3036.9 892.47,3072.9 912.47,3092.9 938.47,3092.9 961.47,3115.9 961.47,3228.31 v5(1077.47,3344.31)
  Bottom Layer w20: v5(356.47,2838.9) 358.88,2836.49 R592.2@358.88,2802.9 ; C555.1@969.47,3427.36 980.01,3437.9 v4(1002.47,3437.9) ; v5(1077.47,3344.31) 1093.47,3360.31 v10@1093.47,3547.9
BEEP: R799.2 U1.R3 | length 3220.3
  Top Layer w10: U1.R3@1336.53,2320.91 1336.53,2320.84 v2(1352.47,2304.9) ; R799.2@2422.47,771.36 2446.09,771.36 v3(2473.57,798.84)
  L6_INT_2 w5: v6@1415.3,2414.12 v6(1415.89,2414.71) 1421.08,2419.9 1455.47,2419.9 1462.47,2412.9 1462.47,2390.9 1470.47,2382.9 1505.36,2382.9 1531.36,2408.9 1588.47,2408.9 1617.47,2437.9 v6(1617.47,2468.9)
  Bottom Layer w5: v2(1352.47,2304.9) 1352.47,2334.9 1369.47,2351.9 1387.25,2351.9 1395.93,2360.59 1395.93,2370.94 1392.66,2374.21 1392.66,2384.92 1399.18,2391.44 1405.05,2391.44 1413.97,2400.36 1413.97,2412.79 v6(1415.89,2414.71)
  Bottom Layer w10: v6(1617.47,2468.9) 1635.47,2486.9 2036.37,2486.9 2157.47,2365.8 2157.47,2252.79 2265.17,2145.09 2450.59,2145.09 2728.92,1866.76 2728.92,913.52 2663.05,847.65 2522.09,847.65 v3@2474.94,800.5
BT_HOST_WAKE: U1.T23 U901.7 | length 1531.1
  Top Layer w5: U1.T23@1305.03,1690.99 1320.58,1675.44 1320.58,1582.03 1392.7,1509.91 1644.23,1509.91 v3@1649.21,1504.93
  Top Layer w10: U901.7@1810.47,620.48 1850.18,620.48 v3@1850.26,620.56
  L6_INT_2 w5: v3(1650.65,1502.2) 1898.72,1254.13 1898.72,651.19 1867.68,620.15 v3(1849.99,620.15)
BT_RST: U1.R24 U901.34 | length 1482.5
  Top Layer w5: U1.R24@1336.53,1659.49 v1@1351.83,1644.19 ; U901.34@1409.42,361.15 1409.69,360.88 v1(1409.69,315.73)
  Bottom Layer w5: v1(1351.51,1643.41) 1377.82,1617.1 1377.82,1053.82 1300.81,976.81 1300.81,763.34 1364.61,699.54 1364.61,438.94 1408.81,394.74 v1@1408.81,315.58
BT_WAKE: U1.R21 U901.6 | length 1733.1
  Top Layer w5: U1.R21@1336.53,1753.98 1320.41,1737.86 1266.7,1737.86 1258.25,1729.41 1258.25,1616.37 1279.72,1594.9 1291.01,1594.9 1390.17,1495.74 1623.32,1495.74 1644.43,1474.63 1656.43,1474.63 v3@1662.43,1468.63
  Top Layer w10: U901.6@1810.47,585.05 1849.78,585.05 v3@1849.86,584.97
  L6_INT_2 w5: v3@1659.43,1470.03 1660.46,1470.03 1885.84,1244.65 1885.84,668.01 1861.5,643.67 1838.27,643.67 1829.15,634.55 1829.15,606.23 v3(1851.48,583.9)
  other v3: 1657.72,1470.58
CLK1.8V: C907.2 C914.2 U902.5 X900.4 | length 366.2
  Top Layer w15: U902.5@1096.47,534.9 C907.2@1166.87,534.9 ; v3@1174.5,760.76 1174.5,720.87 X900.4@1176.47,718.9 ; v3(1175.75,556.22) 1175.75,526.02 C907.2@1185.47,516.3
  Bottom Layer w15: v3@1174.51,557.54 1175.07,558.1 C914.2@1175.07,723.9 1175.07,765.81 v3@1175.52,766.26
  other v3: 1174.27,766.14
CODEC_I2C_CLK: R189.1 U1.N5 U7.F1 | length 2148.5
  Top Layer w4.7: U7.F1@1578.87,3599.5 U7.F1@1578.87,3599.9
  Top Layer w5: U1.N5@1399.52,2257.92 1414.22,2272.62 1414.22,2297.85 1423.78,2307.41 1425.42,2307.41 1436.61,2307.41 1447.96,2307.41 1448.47,2306.9 1448.68,2307.11 1448.68,2310.45 v2(1447.51,2310.45) ; U7.F1@1578.87,3599.9 1578.87,3583.31 1594.42,3567.76 1656.04,3567.76 1672.58,3551.22 1672.58,3531.15 1689.91,3513.82 1805.36,3513.82 1816.15,3503.03 1816.15,3453.65 1804.37,3441.87 1745.98,3441.87 R189.1@1718.01,3413.9 ; v1(1617.09,3359.12) 1684.77,3426.8 1704.11,3426.8 R189.1@1712.01,3418.9
  L6_INT_2 w4.5: v2(1447.51,2310.45) 1448.68,2310.45 v2@1448.68,2307.11 ; v2@1448.47,2306.9 1450.98,2309.41 1483.98,2309.41 1495.58,2321.01
  L6_INT_2 w5: 1495.58,2321.01 1751.77,2321.01 1827.6,2396.84 1827.6,3107.61 1616.23,3318.98 v1@1616.23,3358.17
CODEC_I2C_DAT: R183.1 U1.N6 U7.E2 | length 2071.4
  Top Layer w3: U7.E2@1559.19,3619.58 1559.19,3614.93 1569.18,3604.94 1569.18,3593.42
  Top Layer w3.5: U1.N6@1399.52,2226.42 1410.61,2226.42 ; 1415.54,2231.46 1426.99,2242.9 ; 1420.67,2236.48 1410.61,2226.42 ; 1421.49,2237.3 1410.61,2226.42 ; 1428.37,2242.9 1426.99,2242.9 ; v6(1478.57,2331.51) 1478.57,2317.29 1467.26,2305.98 1459.7,2305.98 1449.01,2295.29 1449.01,2256.35 1435.56,2242.9 1426.99,2242.9
  Top Layer w4: U1.N6@1399.52,2226.42 1410.51,2226.42
  Top Layer w5: v6@1478.47,2331.41 v6(1478.57,2331.51) ; 1569.18,3593.42 1569.18,3578.65 1590.37,3557.46 1648.58,3557.46 1659.01,3547.03 1659.01,3524.46 1692.54,3490.93 1710.16,3490.93 1718.01,3483.08 R183.1@1718.01,3479.9 1714.16,3479.9 1638.63,3404.37 1587.33,3404.37 v2(1578.96,3396) v2@1577.63,3397.33
  L6_INT_2 w5: v6@1478.52,2330.07 1484.35,2335.9 1675.47,2335.9 1691.47,2351.9 1762.22,2351.9 1814.41,2404.09 1814.41,3098.96 1578.36,3335.01 v2@1578.36,3394.93 ; v2@1577.63,3397.33 v2(1578.96,3396)
DBUG_5V: C125.2 C127.2 C768.1 L24.1 R206.1 R207.1 R711.2 U22.1 U22.19 | length 1065
  Top Layer w5: R711.2@501.06,3900.9 552.47,3900.9 555.47,3903.9 v5(557.47,3903.9)
  Top Layer w10: L24.1@371.93,3895.9 410.47,3895.9 410.47,3935.9 v5(399.47,3946.9) ; R206.1@587.47,3802.9 v5(587.47,3769.9) 587.47,3739.9 R207.1@589.47,3737.9
  L6_INT_2 w10: v2(523.47,3619.9) 587.47,3683.9 v5(587.47,3769.9) 613.47,3795.9 613.47,3906.9 604.47,3915.9 567.47,3915.9 555.47,3903.9 v5(557.47,3903.9)
  Bottom Layer w10: C125.2@387.47,3899.9 387.47,3934.9 v5(399.47,3946.9) 399.47,3957.9 413.47,3971.9 450.47,3971.9 474.47,3947.9 ; U22.19@414.97,3857.6 414.97,3878.86 443.01,3906.9 443.01,3916.44 481.47,3954.9 538.47,3954.9 552.47,3940.9 552.47,3900.9 555.47,3903.9 v5(557.47,3903.9) ; U22.1@513.47,3674.9 513.47,3648.9 520.47,3641.9 ; v2@523.47,3623.9 523.47,3640.9